# EAGLE board 800i-Filtre-2F (2) (EAGLE 7.1.0)
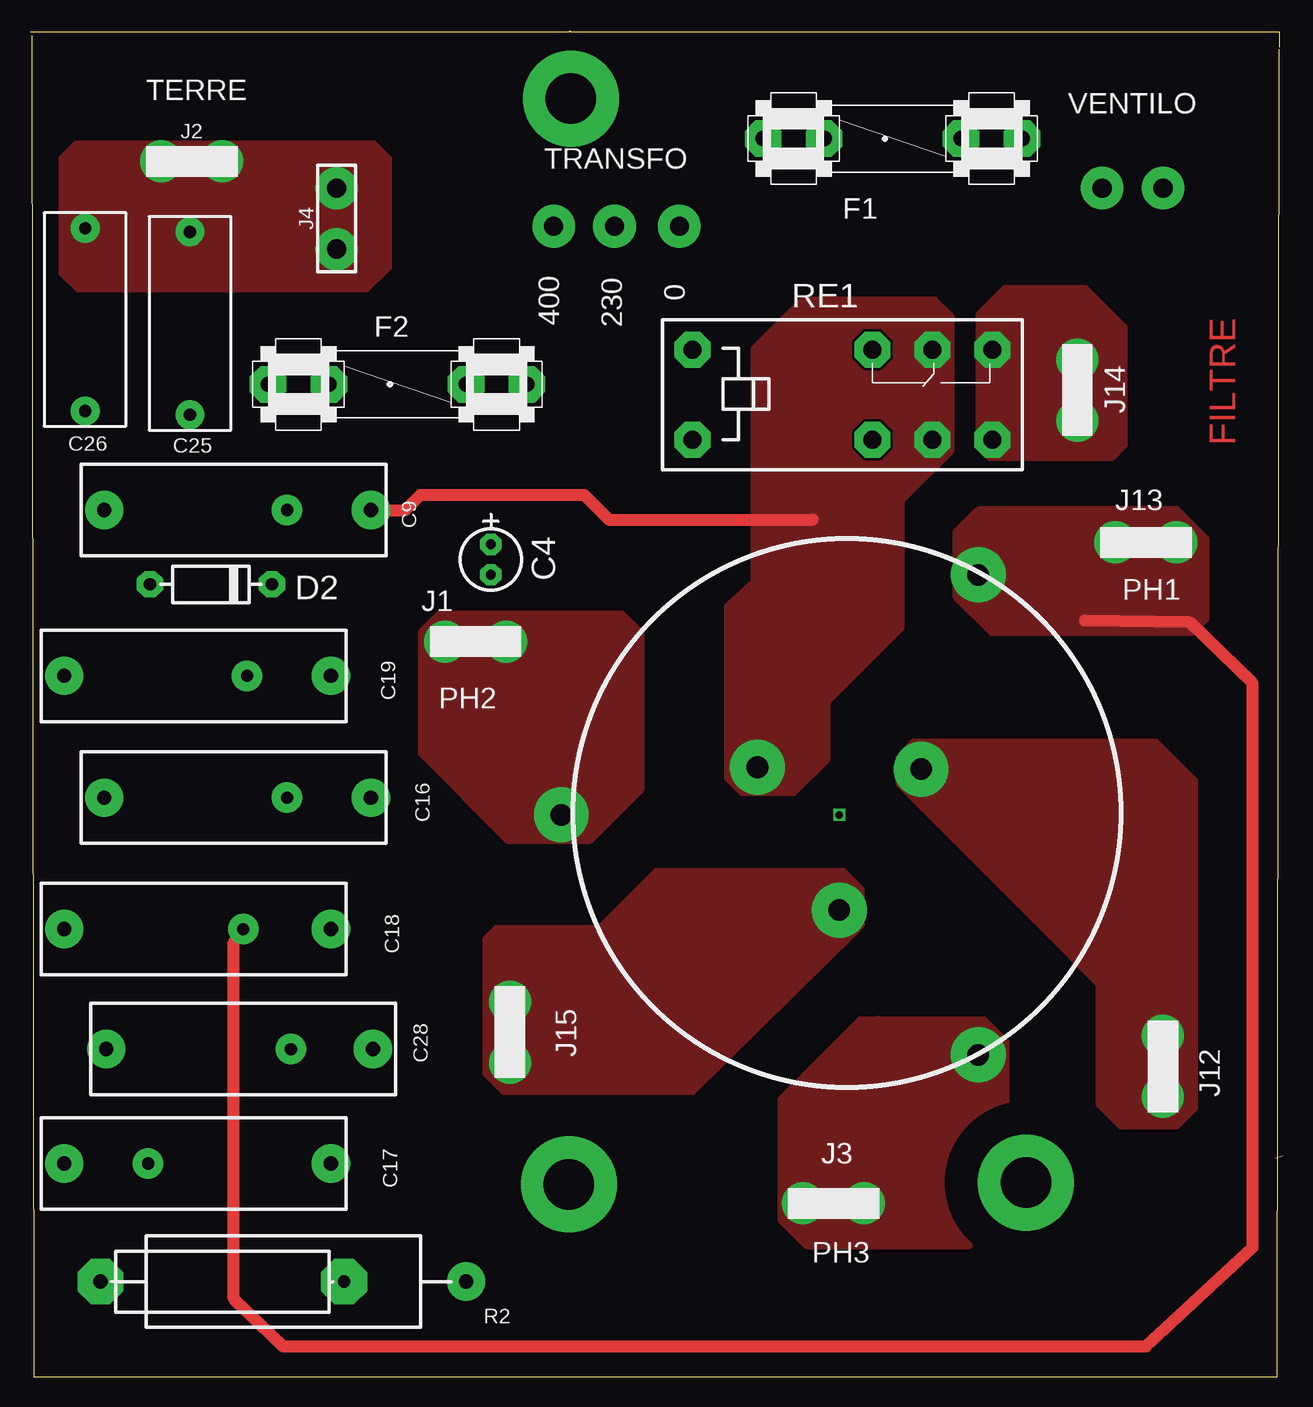
[diagram p0: board, top side]
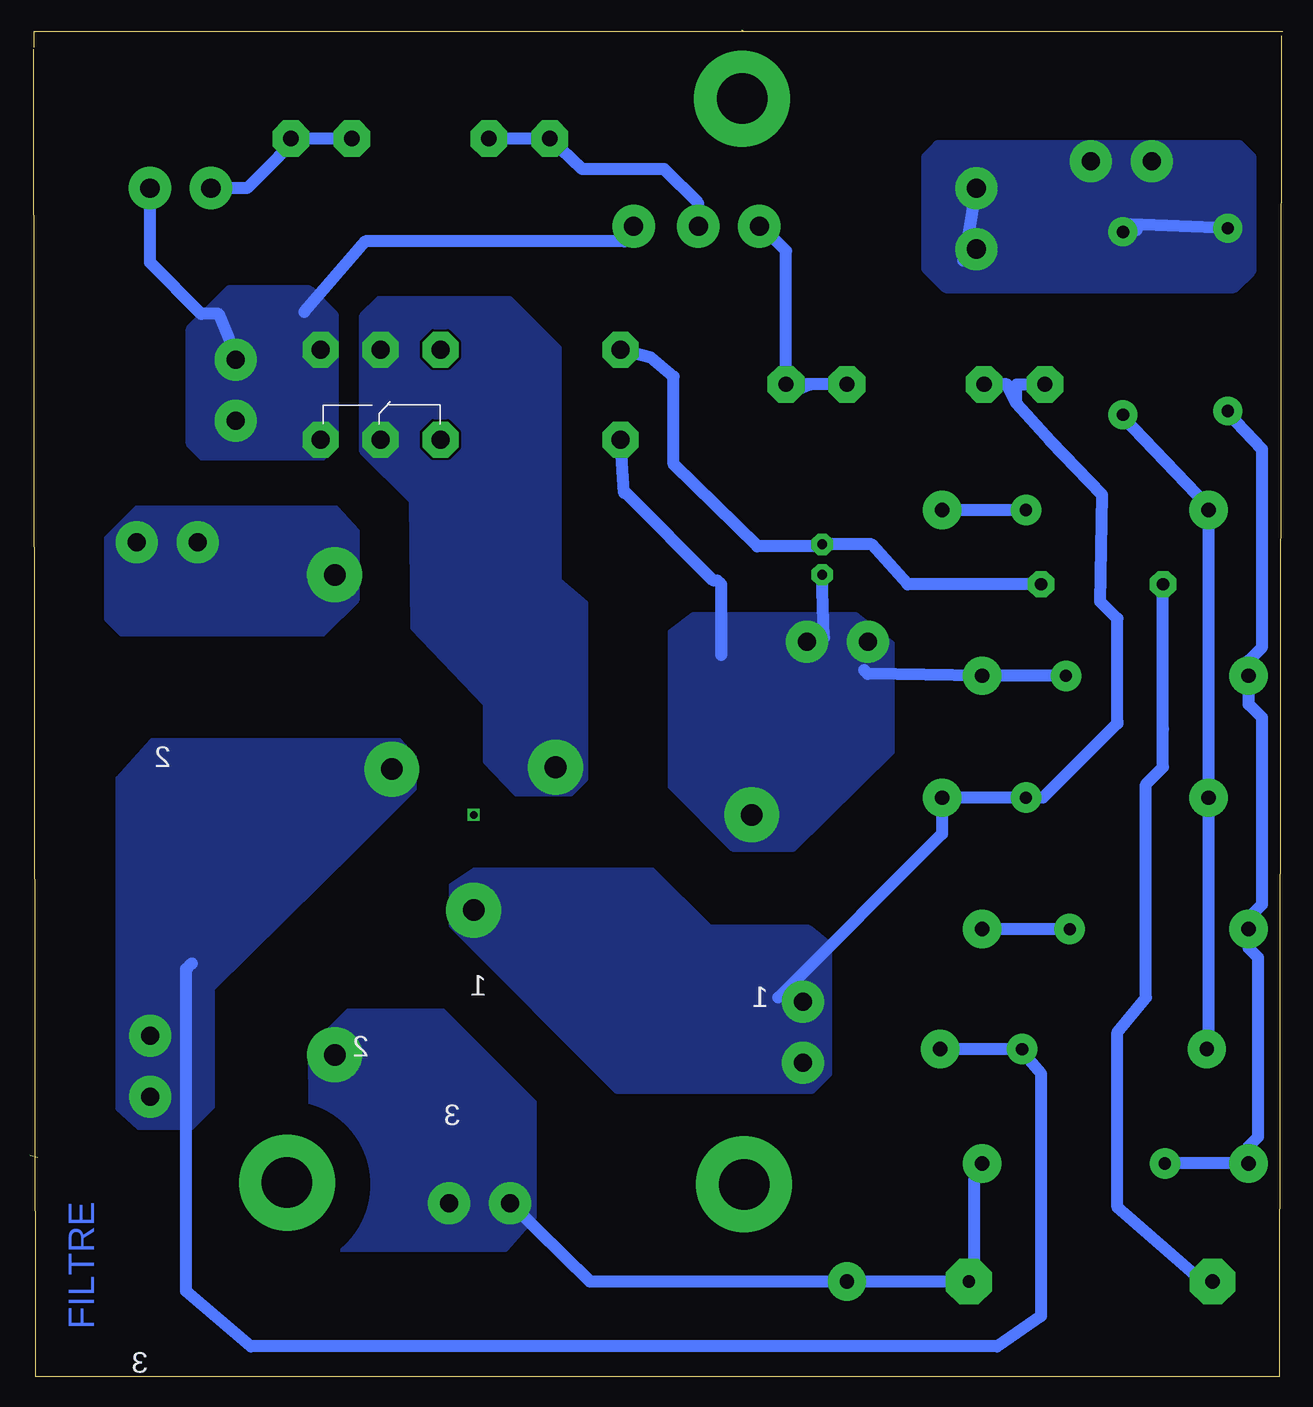
[diagram p1: board, bottom side, seen from below]

Size 104.46 x 112.23 mm. Coordinates in mm from the lower left corner, seen from the top.
Outline: 104.13,110.64 103.97,0 0.32,0 0.16,111.75
Outline: 103.82,18.25 104.46,18.41
Outline: 44.93,112.07 45.09,112.23
Outline: 0,112.07 104.14,112.07 104.14,110.8
Copper layers (1*16): Top 0.035mm / dielectric 1.5mm / Bottom 0.035mm
Design rules "default": minimum track width 10mil, minimum drill 24mil, track to track 8mil, track to pad 8mil, pad to pad 8mil, via to via 8mil, smd to smd 8mil, copper to edge 40mil, drill to drill 8mil, minimum pad ring 10mil, minimum via ring 8mil, stop-mask expansion 0mil, vias tented up to drill 0mil, thermal gap 10mil
tRestrict: area 76.5,9.6 to 89.6,22.7
bRestrict: area 76.1,9.1 to 89.9,22.9; area 38.2,9 to 52,22.8

## Footprints (pad centres in the part's own frame; a part is rotated, then mirrored left to right if it is on the bottom)
02P000RA = drill 0.813 pad 1.778 octagon: N 2.54,0; P 0,0
C-22 = drill 1.2 pad 3.2: 1 2.54,0; 2 24.765,0
C-15 = drill 1.016 pad 2.413: 1 0,0; 2 15.24,0
D-10_1MM = drill 1.016 pad 2.184 octagon: A -5.08,0; K 5.08,0
FUSE = drill 1.27 pad 3.048 octagon: 1 -11.43,0; 1' -6.35,0; 2 10.16,0; 2' 5.08,0
2_TROUS = drill 1.5 pad 3.5: 1 0,0; 2 0,5.08
2_TROUS' = drill 1.6 pad 3.5: 1 0,0; 2 0,5.08
PAST_4,2 = drill 4.2 pad 8: 1 0,0
R-18 = drill 1.016 pad 3.81 octagon: 1 -8.89,0; 2 11.43,0
R-30-5W = drill 1.2 pad 3.2: 1 0,0; 2 30.48,0
FIND16A = drill 1.5 pad 3 octagon: B1 0,0; B2 0,7.5; C1 20,0; C2 20,7.5; R1 15,0; R2 15,7.5; T1 25,0; T2 25,7.5
PAST_1,0 = drill 1.016 pad 2.54: 1 0,0
PAST_1,8 = drill 1.8 pad 4.572: P$1 0,0
PAST_1,6 = drill 1.6 pad 3.556: 1 0,0

## Placement (x,y rotation side)
C4  22µF-63V  [02P000RA]  38.42,69.37 270 top
C9  100nF-X2  [C-22]  30.96,72.23 180 top
C16  100nF-X2  [C-22]  30.96,48.25 180 top
C17  100nF-X2  [C-22]  27.62,17.77 180 top
C18  100nF-X2  [C-22]  27.62,37.3 180 top
C19  100nF-X2  [C-22]  27.62,58.41 180 top
C25  22nF-Y  [C-15]  13.34,95.4 270 top
C26  22nF-Y  [C-15]  4.6,95.72 270 top
C28  100nF-X2  [C-22]  3.81,27.3 0 top
D2  1N4007  [D-10_1MM]  15.08,66.03 0 top
F1  1A  [FUSE]  71.28,103.18 180 top
F2  1A  [FUSE]  30,82.7 180 top
J1  [2_TROUS]  39.69,61.27 90 top
J2  [2_TROUS]  10.95,101.28 270 top
J3  [2_TROUS]  69.53,14.44 90 top
J4  [2_TROUS']  25.56,99.05 180 top
J12  [2_TROUS]  94.46,23.33 0 top
J13  [2_TROUS]  95.57,69.53 90 top
J14  [2_TROUS]  87.31,84.77 180 top
J15  [2_TROUS]  40,26.19 0 top
PAS1  [PAST_4,2]  83.03,16.19 0 top
PAS2  [PAST_4,2]  44.93,16.03 0 top
PAS3  [PAST_4,2]  45.08,106.52 0 top
R1  15k 3w  [R-18]  14.76,7.93 0 top
R2  [R-30-5W]  5.87,7.93 0 top
RE1  48V  [FIND16A]  55.24,78.1 0 top
U$1  [PAST_1,0]  9.84,17.77 0 top
U$2  [PAST_1,0]  21.75,27.3 0 top
U$3  [PAST_1,0]  21.43,48.25 0 top
U$4  [PAST_1,8]  67.47,38.89 0 top
U$5  DKIH-3352-1025 SCHURTER  [PAST_1,8]  60.64,50.79 0 top
U$6  [PAST_1,8]  74.29,50.64 0 top
U$7  [PAST_1,8]  79.06,26.82 0 top
U$8  [PAST_1,8]  79.06,66.83 0 top
U$9  [PAST_1,8]  44.29,46.83 0 top
U$10  [PAST_1,6]  89.38,99.05 90 top
U$11  [PAST_1,6]  94.46,99.05 90 top
U$12  [PAST_1,0]  17.78,37.3 0 top
U$13  [PAST_1,0]  18.1,58.41 0 top
U$14  [PAST_1,6]  48.74,95.88 90 top
U$15  [PAST_1,0]  21.43,72.23 0 top
U$16  [PAST_1,6]  43.66,95.88 0 top
U$17  [PAST_1,6]  54.13,95.88 0 top

## Library data of the parts
C4 D2 R1 R2 = passif
C9 C16-C19 C25 C26 C28 = C
F1 F2 = SPECIAL
J1-J3 J12-J15 = CONNECT1
J4 = connect
PAS1-PAS3 U$1-U$17 = PAST
RE1 = Special1

## Nets
GNDA: C25.1 C26.1 J2.1 J2.2 J4.1 J4.2
N$1: C9.1 RE1.C1 RE1.C2 U$5.P$1 U$15.1
N$2: C28.2 J12.1 J12.2 U$2.1 U$6.P$1
N$3: D2.A R1.1 R2.1
N$4: C4.P D2.K RE1.B2
N$11: C16.1 F2.2 F2.2' J15.1 J15.2 U$3.1 U$4.P$1
N$12: J14.1 J14.2 RE1.T1 RE1.T2 U$11.1 U$17.1
N$14: F2.1 F2.1' U$16.1
N$26: F1.2 F1.2' U$14.1
N$32: C17.1 J3.1 J3.2 R1.2 R2.2 U$7.P$1
N$36: C9.2 C16.2 C25.2 C28.1
N$37: C4.N C19.1 J1.1 J1.2 RE1.B1 U$9.P$1 U$13.1
N$40: C18.1 J13.1 J13.2 U$8.P$1 U$12.1
N$45: C17.2 C18.2 C19.2 C26.2 U$1.1
P1: F1.1 F1.1' U$10.1

## Tracks (layer width: path | path; a pad name or v marks a point on that pad's centre or on a via)
GNDA
  Bottom 1.016: C26.1 12.7,96.04 12.22,95.56 C25.1 | 26.51,93.18 J4.1 | 26.51,93.18 J4.2 | 26.67,93.02 26.51,93.18
  pour Bottom (isolate 0.014, no thermals): 3.65,102.55 28.73,102.55 29.69,101.59 29.69,92.39 28.1,90.8 4.13,90.8 2.7,92.23 2.7,101.59
  pour Top (isolate 0.014, no thermals): 3.81,102.86 28.73,102.86 30,101.59 30,92.39 28.1,90.48 3.97,90.48 2.54,91.91 2.54,101.59
N$1
  Top 1.016: C9.1 31.27,72.22 32.54,73.49 46.2,73.49 48.26,71.43 65.25,71.43
  Bottom 1.016: C9.1 | U$15.1 C9.1 | C9.1
  pour Bottom (isolate 0.014, no thermals): 60.32,66.35 60.33,85.72 64.45,89.85 66.83,89.85 69.37,89.85 75.41,89.85 76.83,88.42 76.83,77.15 72.71,73.02 72.55,62.38 66.52,56.03 66.52,51.27 63.98,48.57 62.71,48.57 59.37,48.57 58.1,49.84 58.1,64.45
  pour Top (isolate 0.014, no thermals): 64.45,89.85 75.41,89.85 76.83,88.42 76.83,77.15 72.71,73.02 72.71,62.38 66.52,56.19 66.52,51.43 63.66,48.57 59.37,48.57 58.1,49.84 58.1,64.29 60.33,66.35 60.33,85.72
N$2
  Bottom 1.016: 90.96,34.44 91.44,33.97 91.44,7.14 86.04,2.53 23.81,2.53 20.16,5.07 20.16,22.38 20.16,25.23 21.91,27.3 | C28.2 28.42,27.14 28.26,27.3 21.91,27.3 | C28.2 | 21.59,27.3 | 21.59,27.3 U$2.1 | 21.91,27.3 21.59,27.3
  pour Bottom (isolate 0.014, no thermals): 73.66,53.02 94.3,53.02 97.15,49.84 97.16,22.38 95.41,20.79 90.96,20.79 89.22,22.54 89.22,32.38 77.31,44.13 72.39,49.05 72.39,51.59
  pour Top (isolate 0.014, no thermals): 73.66,53.02 93.82,53.02 97.16,49.68 97.16,22.38 95.57,20.79 90.96,20.79 89.06,22.7 89.06,32.7 72.39,49.37 72.39,51.59
N$3
  Bottom 1.016: R2.1 6.67,7.93 13.81,14.12 13.81,28.73 11.43,31.58 11.43,49.36 10,50.79 10,53.97 D2.A
N$4
  Bottom 1.016: D2.K 31.27,66.03 34.29,69.37 38.58,69.37 | 38.58,69.37 38.42,69.53 C4.P | 38.58,69.37 38.73,69.21 43.81,69.21 50.8,76.03 50.8,83.34 52.7,84.92 RE1.B2
N$5  (via drill 0.61)
  other vias: 67.47,46.83
N$11
  Bottom 1.016: F2.2' 23.02,82.7 22.23,81.11 | F2.2 22.23,82.7 22.23,81.11 | 22.23,81.11 19.37,77.94 15.08,73.49 15.24,64.6 13.81,63.18 13.81,54.6 13.81,54.44 20,48.25 U$3.1 | U$3.1 | C16.1 28.73,48.25 | U$3.1 | U$3.1 C16.1 | C16.1 28.42,45.24 42.07,31.58 | 20.95,48.41 | U$3.1 20.95,48.41 | U$3.1 20.95,48.41
  pour Bottom (isolate 0.014, no thermals): 39.53,37.46 47.78,37.46 52.55,42.22 67.47,42.22 69.37,40.95 69.37,37.62 55.56,23.81 39.21,23.81 37.78,25.24 37.78,36.03
  pour Top (isolate 0.014, no thermals): 52.23,42.22 67.79,42.22 69.37,40.63 69.37,37.62 68.9,37.14 55.25,23.65 39.53,23.65 37.94,25.24 37.94,36.51 38.89,37.46 47.47,37.46
N$12
  Bottom 1.016: J14.1 87.15,84.77 88.74,88.58 90.17,88.58 94.46,92.86 U$11.1 | U$17.1 54.45,95.88 54.93,94.61 76.52,94.61 81.6,88.73
  pour Bottom (isolate 0.014, no thermals): 79.22,88.42 79.22,77.94 80.17,76.83 90.01,76.83 90.96,77.78 90.96,87.31 87.79,90.48 81.28,90.48
  pour Top (isolate 0.014, no thermals): 81.28,90.8 87.95,90.8 91.28,87.47 91.28,77.62 90.17,76.51 80.01,76.51 79.06,77.46 79.06,88.58
N$14
  Bottom 1.016: 39.37,82.7 40.16,82.38 | F2.1' 39.37,82.7 | 39.37,82.7 40.48,82.7 F2.1 41.43,93.81 43.5,95.88 U$16.1
N$26
  Bottom 1.016: U$14.1 48.74,97.78 51.59,100.64 58.42,100.64 F1.2 66.04,103.18 66.2,103.02 F1.2'
N$32
  Bottom 1.016: C17.1 25.24,16.98 25.72,16.5 25.72,8.88 26.35,8.25 26.19,8.09 R1.2 36.2,7.93 | 36.2,7.93 | 36.2,7.93 R2.2 57.78,7.93 J3.2 | J3.2 | J3.2
  pour Bottom (isolate 0.014, no thermals): 68.42,28.89 70.01,30.47 77.95,30.47 81.12,27.3 80.96,12.06 79.69,10.63 64.77,10.63 62.39,13.33 62.39,22.85
  pour Top (isolate 0.014, no thermals): 70.8,29.84 79.53,29.84 81.44,27.93 81.44,13.96 78.26,10.79 64.77,10.79 62.55,13.01 62.55,23.17 69.06,29.68 69.21,29.84 70.64,29.84
N$36
  Bottom 1.016: C9.2 6.35,72.07 6.19,71.91 C16.2 6.19,27.77 6.51,27.46 C28.1 | C9.2 | C25.2 13.34,80 7.14,73.49 C9.2 | C28.1
N$37
  Bottom 1.016: 34.92,58.89 34.61,58.57 C19.1 24.92,58.41 24.77,58.25 24.61,58.41 U$13.1 | RE1.B1 54.93,73.65 54.77,73.65 47.47,66.35 47.15,66.35 46.83,66.03 46.83,60.16 | 38.26,61.59 C4.N
  pour Bottom (isolate 0.014, no thermals): 35.56,63.49 49.21,63.49 51.12,62.07 51.12,49.21 45.88,43.97 40.8,43.97 32.54,52.06 32.54,61.11
  pour Top (isolate 0.014, no thermals): 34.92,63.65 49.37,63.65 50.96,62.07 50.96,48.89 46.67,44.6 39.85,44.6 32.54,51.91 32.54,62.07 33.97,63.49 34.13,63.65 34.77,63.65
N$40  (via drill 0.61)
  Top 1.016: 87.95,63.02 96.68,62.86 101.92,57.78 101.92,10.79 93.03,2.53 21.11,2.53 16.99,6.5 16.99,36.19 17.78,36.98 U$12.1
  Bottom 0: 24.29,37.3 C18.1
  Bottom 1.016: U$12.1 | U$12.1 24.29,37.3
  other vias: 17.78,37.3
  pour Bottom (isolate 0.014, no thermals): 78.9,72.38 95.57,72.38 98.11,69.84 98.11,63.18 96.84,61.91 80.01,61.91 77.15,64.76 77.15,70.48
  pour Top (isolate 0.014, no thermals): 79.22,72.38 95.57,72.38 98.11,69.84 98.11,63.18 96.84,61.91 80.17,61.91 77.15,64.92 77.15,70.48 78.9,72.23
N$45
  Bottom 1.016: C18.2 2.7,37.14 2.86,36.98 2.86,35.71 2.06,34.92 2.06,20 2.86,19.2 C17.2 9.68,17.77 9.84,17.93 | C18.2 | 3.02,58.41 | 3.02,58.41 C19.2 2.86,59.68 1.75,60.79 1.75,77.3 4.6,80.32 C26.2 | C18.2 2.86,38.25 1.75,39.36 1.75,54.92 2.86,56.03 2.86,58.26 3.02,58.41 | 9.84,17.93 | 9.84,17.93 U$1.1
P1
  Bottom 1.016: 89.54,99.05 U$10.1 | 89.54,99.05 86.36,99.05 83.66,101.75 F1.1 F1.1' | 89.54,99.05 89.69,98.89

## Text on the board
Top: FILTRE
Bottom: FILTRE
tNames: TERRE | VENTILO | TRANSFO | 0 | 400 | 230 | PH1 | PH2 | PH3
bNames: 2 | 1 | 1 | 2 | 3 | 3
tValues: TERRE | 48V 2X10A | PH1 | DKIH-3352-1025 SCHURTER